# EAGLE board PCB_ALIM version 5 (EAGLE 9.6.2)
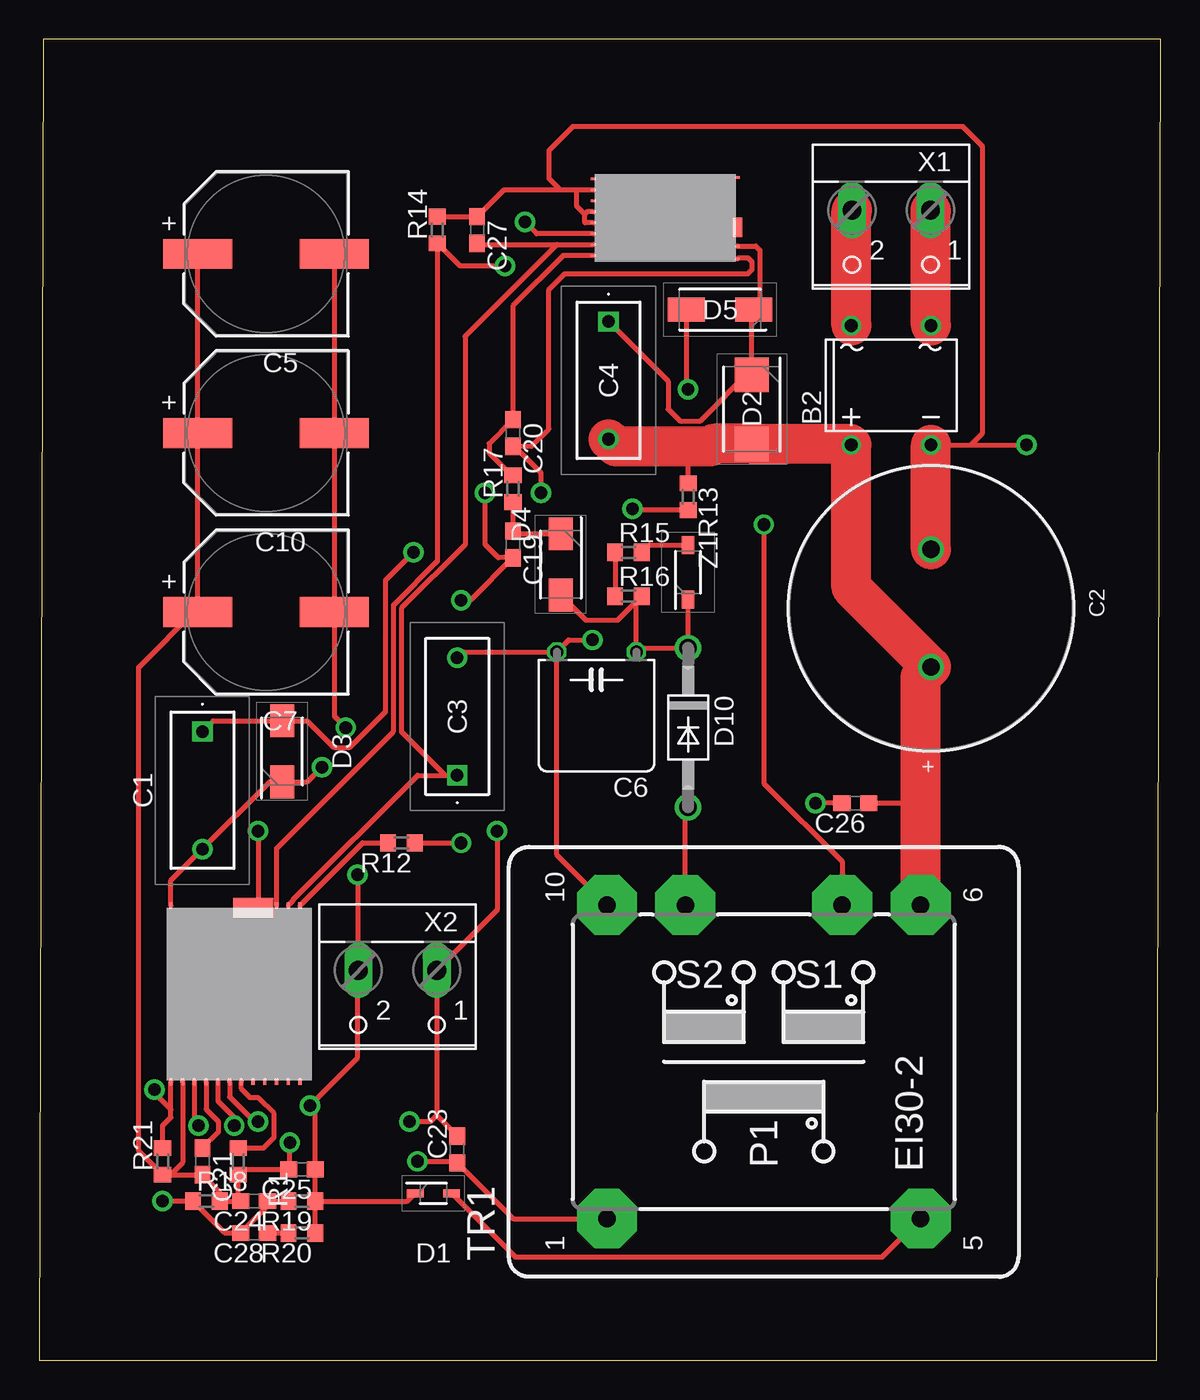
[diagram p0: board, top side]
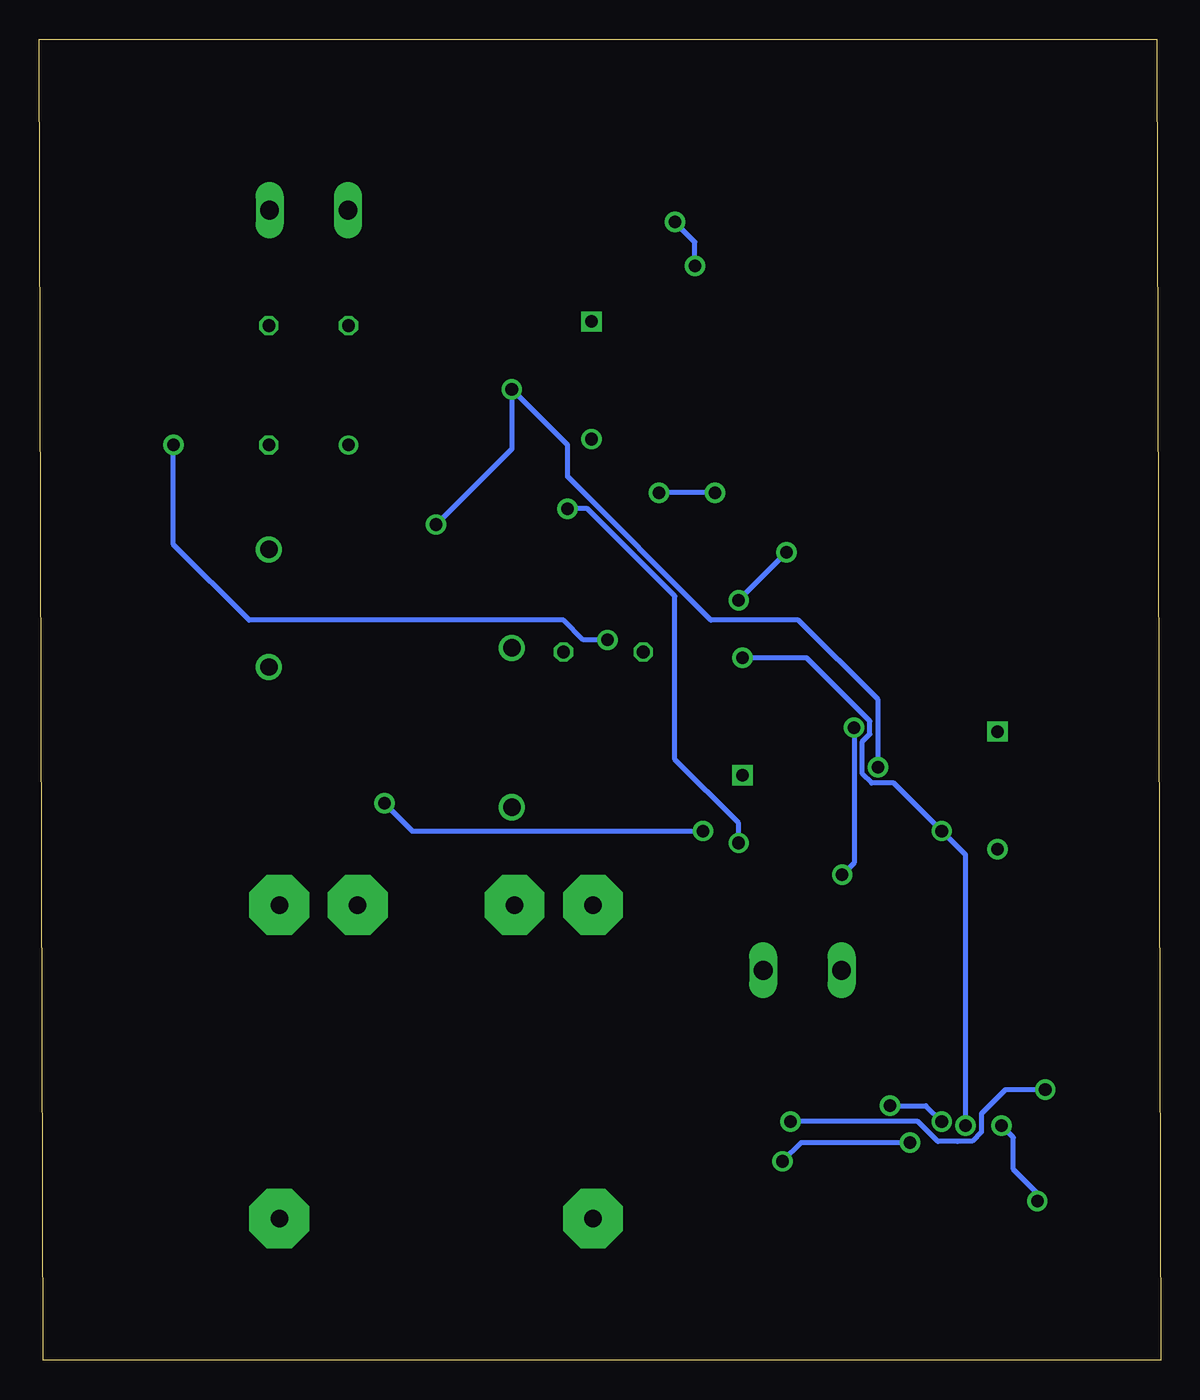
[diagram p1: board, bottom side, seen from below]

Size 71.55 x 84.32 mm. Coordinates in mm from the lower left corner, seen from the top.
Outline: 0,0 71.3,0 71.55,84.32 0.25,84.32 0,0
Copper layers (1*16): Top 0.035mm / dielectric 1.5mm / Bottom 0.035mm
Design rules "ENSEA_2022_04_08": minimum track width 0.2mm, minimum drill 0.6mm, track to track 0.2mm, track to pad 0.2mm, pad to pad 0.185mm, via to via 0.2mm, smd to smd 0.185mm, copper to edge 1mm, drill to drill 0.4mm, minimum pad ring 0.2mm, minimum via ring 0.2mm, stop-mask expansion 4mil, vias tented up to drill 0mil, thermal gap 0.4mm

## Footprints (pad centres in the part's own frame; a part is rotated, then mirrored left to right if it is on the bottom)
DB = drill 0.813: + -2.54,-3.81 | drill 0.813 octagon: - 2.54,-3.81; AC1 2.54,3.81; AC2 -2.54,3.81
MKP1J012202C00KSSD = drill 0.8 pad 1.3 square: 1 0,0 | drill 0.8 pad 1.3: 2 7.5,0
WCAP-ATG8_18X41X7.5(DXL) = drill 1.1: 1 3.75,0; 2 -3.75,0
WCAP-ASLI_10X10.5(DXL) = smd 4.4 x 1.9: 1 4.35,0; 2 -4.35,0
C050H075X075 = drill 0.813 octagon: 1 -2.54,0; 2 2.54,0
C0603 = smd 1.1 x 1: 1 -0.85,0; 2 0.85,0
SOD2513X120N = smd 1.075 x 0.5: 1 -1.162,0; 2 1.162,0
DIOM5436X261N = smd 2.2 x 2.15: 1 -2.2,0; 2 2.2,0
SODFL5226X240N = smd 2.09 x 1.53: 1 -1.95,0; 2 1.95,0
DIOM5226X240N = smd 2.35 x 1.55: 1 -2.15,0; 2 2.15,0
DO41-10 = drill 1.118: A 5.08,0; C -5.08,0
R0603 = smd 1 x 1.1: 1 -0.85,0; 2 0.85,0
EI30-2 = drill 1.118 pad 3.81 octagon: 1 -10.008,10.008; 5 -10.008,-10.008; 6 10.008,-10.008; 7 10.008,-5.004; 9 10.008,5.004; 10 10.008,10.008
INNOSWITCH4_FOOTPRINT = smd 0.203 x 0.406: 1 -4.56,-5.08; 2 -3.81,-5.08; 3 -3.06,-5.08; 4 -2.31,-5.08; 5 -1.56,-5.08; 6 -0.81,-5.08; 7 -0.06,-5.08; 8 0.69,-5.08; 9 1.44,-5.08; 10 2.19,-5.08; 11 2.94,-5.08; 12 3.69,-5.08; 13 3.69,6.17; 14 2.94,6.17; 15 2.19,6.17; 24 -4.56,6.17 | smd 2.54 x 1.27: 16 0.7,6
CPZ1061M_FOOTPRINT = smd 0.152 x 0.305: P$1 -2.86,3.91; P$2 -2.76,-5.29; P$3 -2.06,-5.29; P$4 -1.36,-5.29; P$5 -0.66,-5.29; P$6 0.04,-5.29; P$7 0.74,-5.29; P$8 1.44,-5.29; P$9 2.14,-5.29; P$10 2.34,3.91; P$12 1.54,3.91 | smd 1.27 x 0.635: P$11 0.34,3.91
W237-102 = drill 1.194 long: 1 -2.5,-1.27; 2 2.5,-1.27
SOD3716X135N = smd 1.15 x 0.8: 1 -1.75,0; 2 1.75,0

## Placement (x,y rotation side)
B2  DBDB104G  [DB]  54.36,62.23 0 top
C1  MKP1J012202C00KSSD  [MKP1J012202C00KSSD]  10.41,40.13 270 top
C2  120 µF  [WCAP-ATG8_18X41X7.5(DXL)]  56.9,48.01 270 top
C3  MKP1J012202C00KSSD  [MKP1J012202C00KSSD]  26.67,37.34 90 top
C4  MKP1J012202C00KSSD  [MKP1J012202C00KSSD]  36.32,66.29 270 top
C5  220 µF  [WCAP-ASLI_10X10.5(DXL)]  14.48,70.61 180 top
C6  [C050H075X075]  35.56,45.21 180 top
C7  220 µF  [WCAP-ASLI_10X10.5(DXL)]  14.48,47.75 180 top
C10  220 µF  [WCAP-ASLI_10X10.5(DXL)]  14.48,59.18 180 top
C19  1uF, 100V  [C0603]  30.23,52.07 270 top
C20  100nF, 50V  [C0603]  30.23,59.18 270 top
C21  2.2uF, 25V  [C0603]  10.41,12.7 270 top
C23  1uF, 25V  [C0603]  26.67,13.46 90 top
C24  330pF, 50V  [C0603]  13.72,10.16 180 top
C25  1uF, 50V  [C0603]  16.76,12.19 180 top
C26  220pF, 250VAC  [C0603]  52.07,35.56 180 top
C27  4.7uF, 50V  [C0603]  27.94,72.14 270 top
C28  6.8n, 50V  [C0603]  13.72,8.13 180 top
D1  BAV21WS-7-F  [SOD2513X120N]  25.15,10.67 0 top
D2  SMBJ200A  [DIOM5436X261N]  45.47,60.71 270 top
D3  US1M-13-F  [SODFL5226X240N]  15.49,38.86 90 top
D4  US1M-13-F  [SODFL5226X240N]  33.27,50.8 270 top
D5  US1K-13-F  [DIOM5226X240N]  43.43,67.06 180 top
D10  1N4933  [DO41-10]  41.4,40.39 270 top
R1  47, 1/10W  [R0603]  12.7,12.7 270 top
R12  2M  [R0603]  23.11,33.02 180 top
R13  2M  [R0603]  41.4,55.12 270 top
R14  30k  [R0603]  25.4,72.14 90 top
R15  47  [R0603]  37.59,51.56 0 top
R16  2k  [R0603]  37.59,48.77 0 top
R17  3.09k  [R0603]  30.23,55.63 90 top
R18  10k  [R0603]  10.67,10.16 0 top
R19  150k, 1/8W  [R0603]  16.76,10.16 180 top
R20  10k  [R0603]  16.76,8.13 180 top
R21  0.009  [R0603]  7.87,12.7 90 top
TR1  [EI30-2]  46.23,19.05 90 top
U$1  INNOSWITCH4_DEVICE  [INNOSWITCH4_FOOTPRINT]  12.95,22.86 0 top
U$2  CPZ1061M_DEVICE  [CPZ1061M_FOOTPRINT]  40.64,72.64 270 top
X1  [W237-102]  54.36,72.14 180 top
X2  [W237-102]  22.86,23.62 180 top
Z1  MMSZ5243BT1G  [SOD3716X135N]  41.4,50.29 90 top

## Library data of the parts
B2 = rectifier
C1 C3 C4 = MKP1J012202C00KSSD; DESCRIPTION: Film Capacitors 630V 2200pF 10%; HEIGHT: 9mm; MANUFACTURER_NAME: WIMA; MANUFACTURER_PART_NUMBER: MKP1J012202C00KSSD; MOUSER_PART_NUMBER: 505-M102200/630/10; MOUSER_PRICE-STOCK: https://www.mouser.co.uk/ProductDetail/WIMA/MKP1J012202C00KSSD?qs=ISKKXg98%252B1mgvXB3mGEyXQ%3D%3D
C2 = Eagle_WCAP-ATG8 (rev20a); DATASHEET-URL: https://www.we-online.com/catalog/datasheet/860011381013.pdf; DF: 15%; DIAMETER: 18mm; I-LEAK: 1440uA; I-RIPPLE: 520mA; L: 41mm; OPERATING-TEMPERATURE: -40 °C up to +85 °C; PART-NUMBER: 860011381013; PITCH: 7.5mm; TECHNICAL-REFERENCE: ATAL410121M400DSPS1B000; VR: 400V(DC)
C5 C7 C10 = Eagle_WCAP-ASLI (rev20a); DATASHEET-URL: https://www.we-online.com/catalog/datasheet/865080657018.pdf; DF: 12%; DIAMETER: 10mm; I-LEAK: 110uA; I-RIPPLE: 650mA; L: 10.5mm; OPERATING-TEMPERATURE: -55 °C up to +105 °C; PART-NUMBER: 865080657018; TECHNICAL-REFERENCE: ASEF105221M050DVCTEB000; VR: 50V(DC)
C6 = rcl; SPICEPREFIX: C
C19-C21 C23-C28 R1 R12-R21 = rcl
D1 = BAV21WS-7-F; ARROW_PART_NUMBER: BAV21WS-7-F; ARROW_PRICE-STOCK: https://www.arrow.com/en/products/bav21ws-7-f/diodes-incorporated?region=nac; DESCRIPTION: Diodes Inc BAV21WS-7-F Switching Diode; HEIGHT: 1.2mm; MANUFACTURER_NAME: Diodes Inc.; MANUFACTURER_PART_NUMBER: BAV21WS-7-F; MOUSER_PART_NUMBER: 621-BAV21WS-F; MOUSER_PRICE-STOCK: https://www.mouser.co.uk/ProductDetail/Diodes-Incorporated/BAV21WS-7-F?qs=YvhBCnANyPsfd19lPwY%252BKQ%3D%3D
D2 = SMBJ200A; ARROW_PART_NUMBER: SMBJ200A; ARROW_PRICE-STOCK: https://www.arrow.com/en/products/smbj200a/littelfuse?region=nac; DESCRIPTION: Littelfuse SMBJ200A, Uni-Directional TVS Diode, 600W, 2-Pin DO-214AA; HEIGHT: 2.61mm; MANUFACTURER_NAME: LITTELFUSE; MANUFACTURER_PART_NUMBER: SMBJ200A; MOUSER_PART_NUMBER: 576-SMBJ200A; MOUSER_PRICE-STOCK: https://www.mouser.co.uk/ProductDetail/Littelfuse/SMBJ200A?qs=JJML70Qc14u62%252Bryrz1EOg%3D%3D
D3 D4 = US1M-13-F; ARROW_PART_NUMBER: US1M-13-F; ARROW_PRICE-STOCK: https://www.arrow.com/en/products/us1m-13-f/diodes-incorporated?region=europe; DESCRIPTION: Diode Fast 1A 1000V 75ns SMA Diodes Inc US1M-13-F, SMT Switching Diode, 1000V 1A, 75ns, 2-Pin DO-214AC; HEIGHT: 2.4mm; MANUFACTURER_NAME: Diodes Inc.; MANUFACTURER_PART_NUMBER: US1M-13-F; MOUSER_PART_NUMBER: 621-US1M-F; MOUSER_PRICE-STOCK: https://www.mouser.co.uk/ProductDetail/Diodes-Incorporated/US1M-13-F?qs=eQQ5Ftq4seWl6gFwdb8vMg%3D%3D
D5 = US1K-13-F; ARROW_PART_NUMBER: US1K-13-F; ARROW_PRICE-STOCK: https://www.arrow.com/en/products/us1k-13-f/diodes-incorporated; DESCRIPTION: Diodes Inc US1K-13-F Switching Diode, 1A 800V, 2-Pin SMA; HEIGHT: 2.4mm; MANUFACTURER_NAME: Diodes Inc.; MANUFACTURER_PART_NUMBER: US1K-13-F; MOUSER_PART_NUMBER: 621-US1K-F; MOUSER_PRICE-STOCK: https://www.mouser.co.uk/ProductDetail/Diodes-Incorporated/US1K-13-F?qs=mGuGFjoQO77tAHeJoOiWyQ%3D%3D
D10 = diode
TR1 = trafo
U$1 U$2 = InnoSwitch4_CZ
X1 X2 = con-wago-500; MPN: 237-102; OC_FARNELL: unknown; OC_NEWARK: 70K9898
Z1 = MMSZ5243BT1G; ARROW_PART_NUMBER: MMSZ5243BT1G; ARROW_PRICE-STOCK: https://www.arrow.com/en/products/mmsz5243bt1g/on-semiconductor; DESCRIPTION: ON Semiconductor MMSZ5243BT1G Zener Diode, 13V 5% 0.5 W SMT 2-Pin SOD-123; HEIGHT: 1.35mm; MANUFACTURER_NAME: onsemi; MANUFACTURER_PART_NUMBER: MMSZ5243BT1G; MOUSER_PART_NUMBER: 863-MMSZ5243BT1G; MOUSER_PRICE-STOCK: https://www.mouser.co.uk/ProductDetail/ON-Semiconductor/MMSZ5243BT1G?qs=P4IOph%252Bbot9jmJtv%252Bfx8eg%3D%3D

## Nets
BPP: C3.1 C27.2 U$1.14 U$2.P$8
BPS: C21.1 U$1.4
DRAIN: C1.2 D3.1 D5.2 TR1.7 U$1.24
FB: C24.1 C28.2 R18.1 R19.2 U$1.3
FL3: C5.1 C7.1 C10.1 C21.2 C23.1 C24.2 C25.2 R1.2 R18.2 R21.1 TR1.1 U$1.2
FW: R1.1 U$1.7
GND: B2.- C2.2 C3.2 C6.2 C27.1 R14.2 TR1.10 U$1.5 U$1.16 U$2.P$3 U$2.P$5 U$2.P$6
HSD: R14.1 U$1.15 U$2.P$7
L: B2.AC1 X1.1
N: B2.AC2 X1.2
N$1: C6.1 D4.2 D10.C R16.2 Z1.1
N$2: R15.2 Z1.2
N$3: R12.2 U$1.13
N$4: C28.1 R20.2
N$5: R12.1 R13.2
N$8: C1.1 C19.2 C20.2 D3.2 U$2.P$10
N$9: C19.1 D4.1 R17.1
N$10: C20.1 R17.2 U$2.P$9
N$11: D10.A TR1.9
N$12: C4.1 D2.1 D5.1 U$2.P$12
N$13: R15.1 R16.1
N$21: D1.2 TR1.5
RTN: C23.2 C26.2 R21.2 U$1.1 X2.1
VCC_330V: B2.+ C2.1 C4.2 C26.1 D2.2 R13.1 TR1.6
VOUT: C5.2 C7.2 C10.2 C25.1 D1.1 R19.1 R20.1 U$1.6 X2.2

## Tracks (layer width: path | path; a pad name or v marks a point on that pad's centre or on a via)
BPP
  Top 0.305: C27.2 28.02,71.2 33.02,71.2 | 33.02,71.2 U$2.P$8 | 33.02,71.2 27.18,65.36 27.18,52.07 23.11,48.01 23.11,40.13 25.91,37.34 C3.1 24.15,37.34 16.19,29.38 16.19,29.33 U$1.14
BPS
  Top 0.305: C21.1 11.43,14.57 11.43,15.24 10.64,16.03 U$1.4
DRAIN  (via drill 0.8 pad 1.3)
  Top 0.305: v46.23,53.34 46.23,36.83 51.23,31.83 TR1.7 | D5.2 41.28,62.09 v41.4,61.98 | U$1.24 8.39,30.61 C1.2 14.69,36.91 D3.1 17.1,36.91 v18.03,37.85
  Bottom 0.305: v46.23,53.34 41.4,58.17 v41.4,61.98 37.85,58.42 37.85,56.39 28.7,47.24 23.11,47.24 18.03,42.16 v18.03,37.85
FB  (via drill 0.8 pad 1.3)
  Top 0.305: 14.82,10.41 C24.1 | C24.1 14.57,9.83 C28.2 11.85,8.13 R18.1 v7.87,10.16 | C24.1 R19.2 | v10.16,14.99 9.89,15.25 U$1.3
  Bottom 0.305: v7.87,10.16 7.87,10.67 9.4,12.19 9.4,14.22 v10.16,14.99
FL3  (via drill 0.8 pad 1.3)
  Top 0.305: TR1.1 30.24,9.04 C23.1 26.58,12.7 v24.13,12.7 | C7.1 10.13,48.01 | 10.13,48.01 C10.1 C5.1 | 8.38,11.85 R21.1 6.35,13.37 6.35,44.23 10.13,48.01 | 8.38,11.85 C21.2 11.52,10.75 R18.2 C24.2 12.7,10.33 R1.2 13.04,12.19 C25.2 15.99,12.27 v15.99,13.89 | U$1.2 9.14,12.61 8.38,11.85
  Bottom 0.305: v15.99,13.89 22.94,13.89 v24.13,12.7
FW
  Top 0.305: 12.89,13.74 R1.1 14.31,13.55 14.99,14.22 14.99,15.75 13.97,16.76 13.46,16.76 12.89,17.33 U$1.7
GND  (via drill 0.8 pad 1.3)
  Top 0.305: 33.25,74.7 32.51,75.44 32.51,77.22 34.04,78.74 58.93,78.74 60.2,77.47 60.2,59.18 59.44,58.42 B2.- v62.99,58.42 | 33.25,74.7 34.29,74.7 | 34.29,74.7 U$2.P$3 | R14.2 C27.1 29.66,74.7 33.25,74.7 | U$2.P$5 34.95,73.3 34.8,73.15 | U$2.P$6 34.84,72.6 34.8,72.64 34.8,73.15 | 34.8,73.15 34.29,73.66 34.29,74.7 | C3.2 27.04,45.21 C6.2 | TR1.10 33.02,32.26 C6.2 | C6.2 33.78,45.97 v35.31,45.97 | U$1.5 11.39,16.55 12.45,15.49 v12.45,14.99 | v13.97,33.78 13.97,29.18 U$1.16
  Top 2.54: C2.2 B2.-
  Bottom 0.305: v35.31,45.97 36.83,45.97 38.1,47.24 58.17,47.24 62.99,52.07 v62.99,58.42 | v12.45,14.99 12.45,32.26 v13.97,33.78 17.03,36.84 18.45,36.84 19.04,37.43 19.04,39.49 18.56,39.97 18.56,40.8 22.59,44.84 C3.2
HSD  (via drill 0.8 pad 1.3)
  Top 0.305: v29.72,69.85 26.84,69.85 R14.1 25.4,51.01 22.61,48.21 22.61,40.13 15.14,32.67 U$1.15 | U$2.P$7 31.73,71.9 v30.99,72.64
  Bottom 0.305: v29.72,69.85 29.72,71.37 v30.99,72.64
L
  Top 2.54: B2.AC1 56.9,73.37 X1.1
N
  Top 2.54: B2.AC2 51.82,73.37 X1.2
N$1
  Top 0.305: Z1.1 D10.C 38.35,45.47 C6.1 38.1,48.43 R16.2 36.92,47.24 34.88,47.24 D4.2
N$2
  Top 0.305: R15.2 38.92,52.04 Z1.2
N$3
  Top 0.305: R12.2 20.63,33.02 U$1.13
N$4
  Top 0.305: C28.1 R20.2
N$5  (via drill 0.8 pad 1.3)
  Top 0.305: R13.2 37.93,54.27 v37.85,54.36 | R12.1 v26.92,33.02
  Bottom 0.305: v26.92,33.02 26.92,34.29 30.99,38.35 30.99,48.77 36.58,54.36 v37.85,54.36
N$8  (via drill 0.8 pad 1.3)
  Top 0.305: U$2.P$10 44.6,70.36 45.21,70.36 45.47,70.1 45.47,69.6 45.21,69.34 33.53,69.34 32.51,68.33 32.51,59.44 31.41,58.33 C20.2 | C20.2 30.23,58.42 | C20.2 30.31,58.33 32,56.64 v32,55.37 | v28.45,55.37 28.45,52.07 29.3,51.22 C19.2 27.52,48.51 v26.92,48.51 | C1.1 11.09,40.81 D3.2 17.1,40.81 18.8,39.12 19.81,39.12 22.1,41.4 22.1,49.78 v23.88,51.56
  Bottom 0.305: v28.45,55.37 v32,55.37 | v23.88,51.56 v26.92,48.51
N$9
  Top 0.305: D4.1 30.4,52.75 C19.1 R17.1
N$10
  Top 0.305: U$2.P$9 33.42,70.5 30.23,67.31 C20.1 28.7,58.51 28.7,57.91 30.14,56.48 R17.2
N$11
  Top 0.305: TR1.9 41.22,35.13 D10.A
N$12
  Top 0.305: D2.1 45.47,63.25 | 45.47,63.25 45.47,66.94 D5.1 45.97,67.45 45.97,70.87 45.72,71.12 44.57,71.12 U$2.P$12 | C4.1 40.13,62.48 40.13,60.71 40.89,59.94 42.16,59.94 45.47,63.25
N$13
  Top 0.305: R15.1 R16.1
N$21
  Top 0.305: TR1.5 53.8,6.6 30.37,6.6 D1.2
RTN  (via drill 0.8 pad 1.3)
  Top 0.305: C26.2 v49.53,35.56 | 25.36,15.62 X2.1 29.21,28.74 v29.21,33.78 | 25.36,15.62 C23.2 | R21.2 7.87,14.99 8.39,15.51 8.39,16 | 8.39,16 U$1.1 | 8.39,16 7.37,17.03 v7.37,17.27 | v23.62,15.24 24.98,15.24 25.36,15.62
  Bottom 0.305: v49.53,35.56 47.75,33.78 v29.21,33.78 | v7.37,17.27 9.91,17.27 11.44,15.73 11.44,14.57 12.03,13.98 12.94,13.98 12.95,13.97 14.22,13.97 15.49,15.24 v23.62,15.24
VCC_330V
  Top 0.305: C26.1 56.24,35.56 | R13.1 41.4,58.32
  Top 2.54: TR1.6 56.24,35.56 56.24,43.6 C2.1 51.82,49.34 B2.+ 51.73,58.51 D2.2 43.02,58.51 42.84,58.32 41.4,58.32 36.79,58.32 C4.2
VOUT  (via drill 0.8 pad 1.3)
  Top 0.305: C5.2 C10.2 C7.2 18.83,41.12 v19.56,40.39 | v20.32,30.99 20.32,24.93 | 20.32,24.93 X2.2 | R20.1 R19.1 | R19.1 C25.1 17.61,15.91 v17.27,16.26 20.32,19.3 20.32,24.93 | U$1.6 12.14,16.81 13.72,15.24 v13.97,15.24 | R19.1 23.48,10.16 D1.1
  Bottom 0.305: v19.56,40.39 19.56,31.75 v20.32,30.99 | v17.27,16.26 14.99,16.26 v13.97,15.24